# EAGLE board TWV (EAGLE 9.6.2)
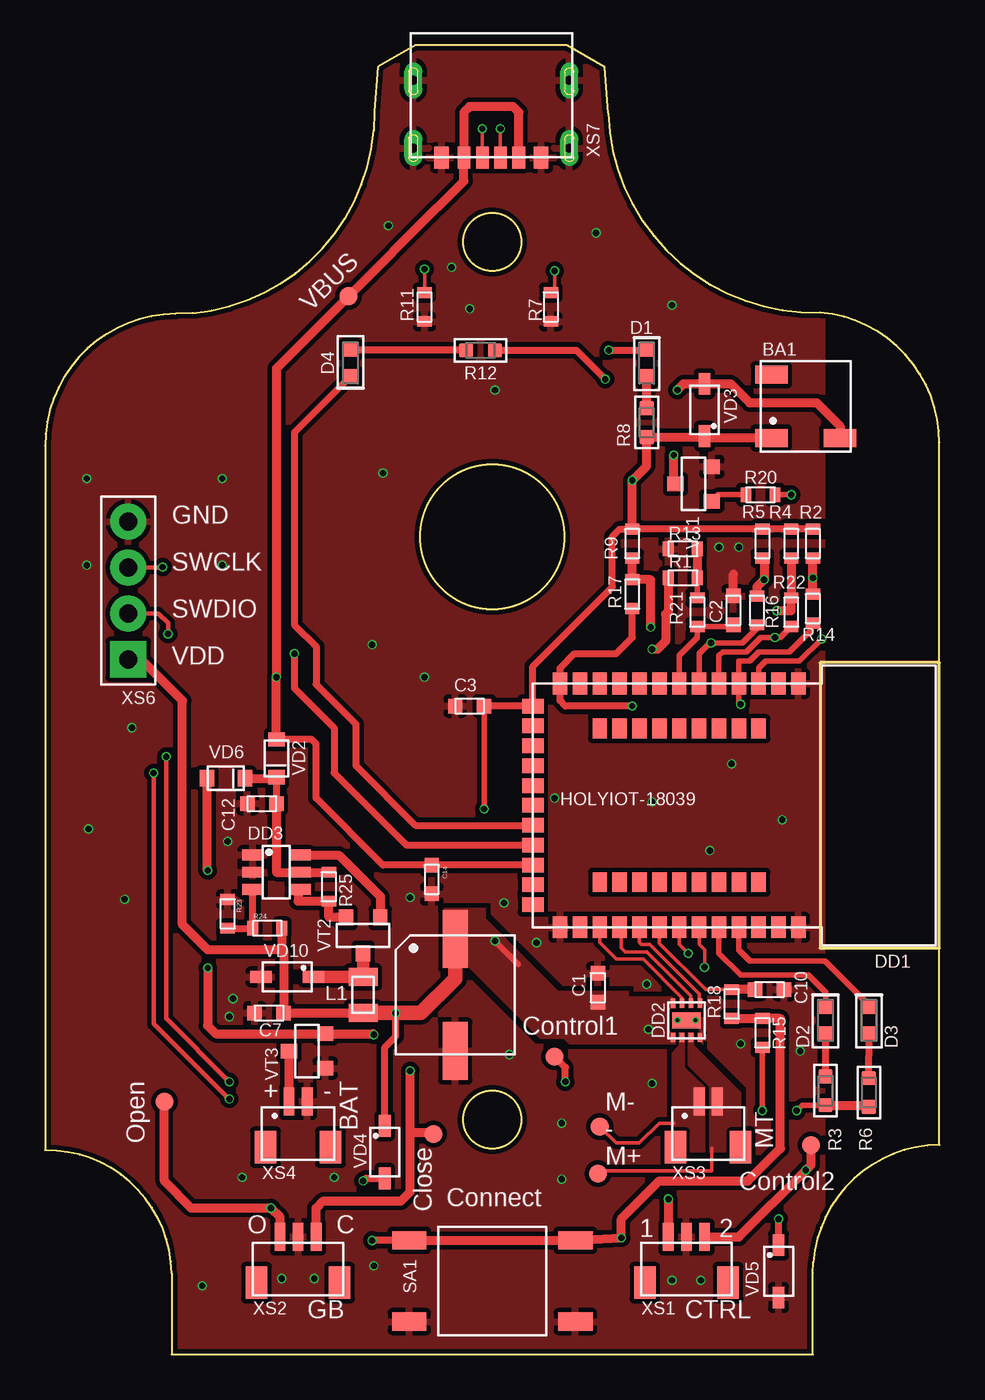
[diagram p0: board, top side]
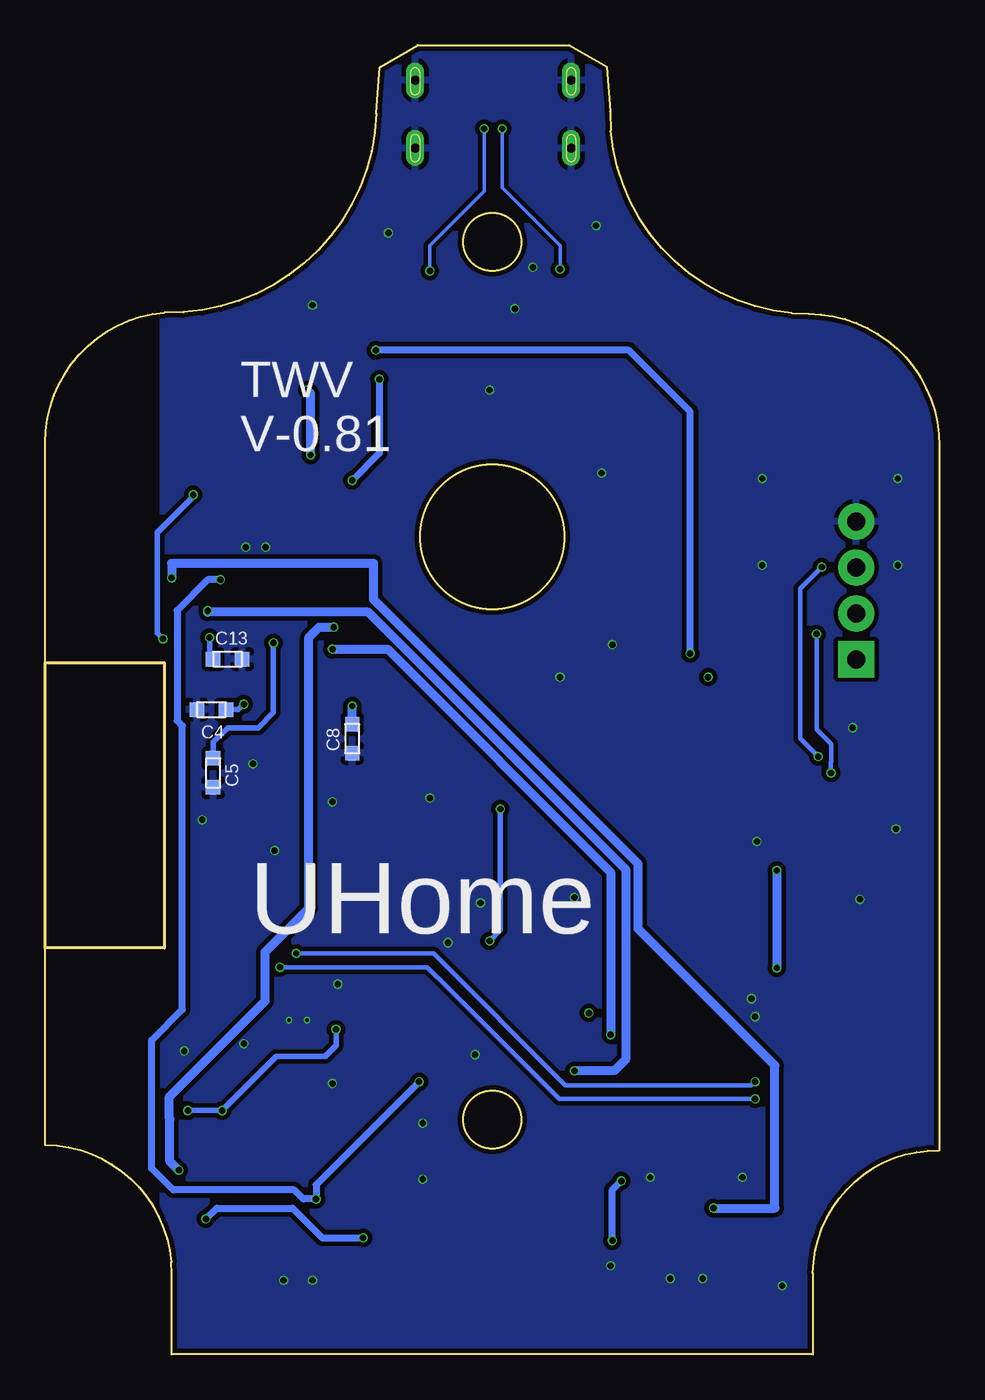
[diagram p1: board, bottom side, seen from below]

Size 49.5 x 72.5 mm. Coordinates in mm from the lower left corner, seen from the top.
Outline: 8.18,57.67 arc80 18.18,67.77 18.23,68.83 18.41,71.3 20.5,72.5 28.88,72.5 30.97,71.29 31.18,68.72 arc90 42.91,57.7 arc-80 49.47,51.13 49.5,50.5 49.5,11.6 arc85 42.53,5.11 42.5,4.5 42.5,0 7,0 7,4.5 arc90 0,11.3 0,50.3 arc-90 7.22,57.62 8.18,57.67
Outline: circle at 24.75,12.99 radius 1.6
Outline: circle at 24.75,61.6 radius 1.6
Outline: circle at 24.75,45.27 radius 4
Copper layers (1*16): Top 0.035mm / dielectric 1.6mm / Bottom 0.035mm
Design rules "jlcpcb-2layers": minimum track width 5mil, minimum drill 0.3mm, track to track 5mil, track to pad 5mil, pad to pad 5mil, via to via 5mil, smd to smd 5mil, copper to edge 0.2mm, drill to drill 6mil, minimum pad ring 10mil, minimum via ring 3mil, stop-mask expansion 4mil, vias tented up to drill 0mil, thermal gap 10mil
Net classes: 0 default: width 0.2 mm, drill 0.3 mm, clearance 0.2 mm
Milling: 4 lines

## Footprints (pad centres in the part's own frame; a part is rotated, then mirrored left to right if it is on the bottom)
SMD-5025-0340-12Ω = smd 1.8 x 1: + -1.9,-1.75; - 1.9,-1.75; GND -1.9,1.75
0603 = smd 0.8 x 0.8: 1 -0.8,0; 2 0.8,0
6.3X8 = smd 1.4 x 3.2: + 0,3.1; - 0,-3.1
0603' = smd 0.8 x 0.8: A 0.75,0; C -0.75,0
HOLYIOT-18039 = smd 1.2 x 0.8: 1 -6.75,6.6; 2 -6.75,5.5; 3 -6.75,4.4; 4 -6.75,3.3; 5 -6.75,2.2; 6 -6.75,1.1; 7 -6.75,0; 8 -6.75,-1.1; 9 -6.75,-2.2; 10 -6.75,-3.3; 11 -6.75,-4.4; 12 -6.75,-5.5; 13 -6.75,-6.6; 25 6.75,-6.6; 26 6.75,-5.5; 27 6.75,-4.4; 28 6.75,-3.3; 29 6.75,-2.2; 30 6.75,-1.1; 31 6.75,0; 32 6.75,1.1; 33 6.75,2.2; 34 6.75,3.3; 35 6.75,4.4; 36 6.75,5.5; 37 6.75,6.6 | smd 0.8 x 1.2: 14 -5.5,-8.1; 15 -4.4,-8.1; 16 -3.3,-8.1; 17 -2.2,-8.1; 18 -1.1,-8.1; 19 0,-8.1; 20 1.1,-8.1; 21 2.2,-8.1; 22 3.3,-8.1; 23 4.4,-8.1; 24 5.5,-8.1 | smd 1.1 x 0.8: 38 -4.25,4.4; 39 -4.25,3.3; 40 -4.25,2.2; 41 -4.25,1.1; 42 -4.25,0; 43 -4.25,-1.1; 44 -4.25,-2.2; 45 -4.25,-3.3; 46 -4.25,-4.4; 47 4.25,4.4; 48 4.25,3.3; 49 4.25,2.2; 50 4.25,1.1; 51 4.25,0; 52 4.25,-1.1; 53 4.25,-2.2; 54 4.25,-3.3; 55 4.25,-4.4
WSON-8 = smd 0.5 x 0.25: 1 -0.95,0.75; 2 -0.95,0.25; 3 -0.95,-0.25; 4 -0.95,-0.75; 5 0.95,-0.75; 6 0.95,-0.25; 7 0.95,0.25; 8 0.95,0.75 | smd 0.9 x 1.6: GND 0,0
SOT23-6 = smd 0.6 x 1.2: 1 -0.95,-1.3; 2 0,-1.3; 3 0.95,-1.3; 4 0.95,1.3; 5 0,1.3; 6 -0.95,1.3
0805 = smd 1 x 1.6: P$1 -1,0; P$2 1,0
0603'' = smd 0.6 x 0.8: 1 -0.8,0; 2 0.8,0
RES0603 = smd 0.8 x 0.8: 1 -0.8,0; 2 0.8,0
K2-1102SP-Z4SC-04 = smd 1.9 x 1: 1 -4.6,2.25; 2 -4.6,-2.25; 3 4.6,-2.25; 4 4.6,2.25
TEST_POINT_2MM = smd 1 x 1: 1 0,0
0805' = smd 0.8 x 0.9: 1 -1.05,0; 2 1.05,0
SOD-123F = smd 1.2 x 0.65: A -1.45,0; C 1.45,0
SOT-23 = smd 0.8 x 0.9: 1 -0.95,-1; 2 0.95,-1; 3 0,1
BM03B-SRSS-TB = smd 0.6 x 1.55: 1 -1,0; 2 0,0; 3 1,0 | smd 1.2 x 1.8: SHIELD@1 -2.3,-2.525; SHIELD@2 2.3,-2.525
BM02B-SRSS-TB = smd 0.6 x 1.55: 1 -0.5,0; 2 0.5,0 | smd 1.2 x 1.8: SHIELD@1 -1.8,-2.525; SHIELD@2 1.8,-2.525
TH1X4-2.54MM = drill 1 pad 2 square: 1 0,3.81 | drill 1 pad 2: 2 0,1.27; 3 0,-1.27; 4 0,-3.81
918-418K2023S40026 = smd 0.7 x 1.2: A5 0.5,-0.53; A9 -1.52,-0.53; B5 -0.5,-0.53; B9 1.52,-0.53 | smd 0.8 x 1.2: A12 -2.75,-0.53; B12 2.75,-0.53 | drill 0.5 long: SH1 -4.32,0; SH2 4.32,0; SH3 -4.32,3.75; SH4 4.32,3.75

## Placement (x,y rotation side)
BA1  SMD-5025-0340-12Ω  [SMD-5025-0340-12Ω]  42.1,52.5 0 top
C1  0.1 uF  [0603]  30.6,20.3 90 top
C2  1 uF  [0603]  38.1,41.2 90 top
C3  0.1 uF  [0603]  23.5,35.9 180 top
C4  1uF  [0603]  40.3,35.7 180 bottom
C5  1uF  [0603]  40.2,32.2 270 bottom
C6  220 uF  [6.3X8]  22.7,19.9 0 top
C7  0.47 uF  [0603]  12.4,18.9 180 top
C8  1uF  [0603]  32.5,34.1 270 bottom
C10  1uF  [0603]  40.1,20.2 0 top
C12  10uF  [0603]  12,30.5 180 top
C13  1uF  [0603]  39.4,38.5 0 bottom
C14  0.1 uF  [0603]  21.4,26.3 270 top
D1  BL-HKC37A-AV-TRB  [0603']  33.3,54.9 270 top
D2  150060RS75000  [0603']  43.2,18.5 270 top
D3  150060RS75000  [0603']  45.6,18.5 270 top
D4  BL-HB337A-AV-TRB  [0603']  16.9,54.9 90 top
DD1  HOLYIOT-18039  [HOLYIOT-18039]  35.1,30.4 270 top
DD2  DRV8837CDSGR  [WSON-8]  35.5,18.5 90 top
DD3  TPS64201DBVR  [SOT23-6]  12.8,26.7 270 top
L1  MCQ1V2012-4R7-R  [0805]  17.6,19.9 270 top
R1  470 kOhm  [0603'']  35.3,43 180 top
R2  470 kOhm  [0603'']  42.5,44.9 90 top
R3  330  [RES0603]  43.2,14.6 90 top
R4  470 kOhm  [0603'']  41.3,44.9 90 top
R5  470 kOhm  [0603'']  39.7,44.9 90 top
R6  330  [RES0603]  45.6,14.5 90 top
R7  5.1 kOhm  [0603'']  28,58 90 top
R8  330  [RES0603]  33.3,51.6 90 top
R9  470 kOhm  [0603'']  32.5,44.9 90 top
R11  5.1 kOhm  [0603'']  21,58 90 top
R12  330  [RES0603]  24.1,55.6 180 top
R13  470 kOhm  [0603'']  35.3,44.6 0 top
R14  1kOhm  [0603'']  42.5,41.3 270 top
R15  470 kOhm  [0603'']  39.7,17.8 270 top
R16  1kOhm  [0603'']  39.4,41.2 270 top
R17  1kOhm  [0603'']  32.5,42.1 270 top
R18  1kOhm  [0603'']  38,19.4 90 top
R20  82  [0603'']  39.6,47.6 180 top
R21  1 kOhm  [0603'']  36.1,41.1 270 top
R22  1kOhm  [0603'']  41.3,41.1 270 top
R23  360 kOhm  [0603'']  10.1,24.4 270 top
R24  620 kOhm  [0603'']  12.3,23.6 0 top
R25  33 mOhm  [0603'']  15.7,25.9 270 top
SA1  K2-1102SP-Z4SC-04  [K2-1102SP-Z4SC-04]  24.75,4.07 180 top
T3  TEST_POINT_2MM  [TEST_POINT_2MM]  28.2,16.5 0 top
T4  TEST_POINT_2MM  [TEST_POINT_2MM]  6.6,14 0 top
T5  TEST_POINT_2MM  [TEST_POINT_2MM]  21.5,12.2 0 top
T6  TEST_POINT_2MM  [TEST_POINT_2MM]  42.4,11.6 0 top
T9  TEST_POINT_2MM  [TEST_POINT_2MM]  30.6,10 0 top
T10  TEST_POINT_2MM  [TEST_POINT_2MM]  30.7,12.6 0 top
T11  TEST_POINT_2MM  [TEST_POINT_2MM]  16.8,58.6 0 top
VD2  SD0805S040S0R5  [0805']  12.8,33 270 top
VD3  SD103CW-AQ  [SOD-123F]  36.5,52.3 270 top
VD4  SD103CW-AQ  [SOD-123F]  18.8,11.2 90 top
VD5  SD103CW-AQ  [SOD-123F]  40.6,4.6 90 top
VD6  SD0805S040S0R5  [0805']  10,31.9 0 top
VD10  SD103CW-AQ  [SOD-123F]  13.4,20.9 0 top
VT1  2SC1623  [SOT-23]  35.9,48.2 90 top
VT2  SI2333  [SOT-23]  17.6,23.2 180 top
VT3  IRLML6401  [SOT-23]  14.5,16.8 90 top
XS1  BM03B-SRSS-TB  [BM03B-SRSS-TB]  35.5,6.5 0 top
XS2  BM03B-SRSS-TB  [BM03B-SRSS-TB]  14,6.5 0 top
XS3  BM02B-SRSS-TB  [BM02B-SRSS-TB]  36.7,14 0 top
XS4  BM02B-SRSS-TB  [BM02B-SRSS-TB]  14,14 0 top
XS6  TH1X4-2.54MM  [TH1X4-2.54MM]  4.6,42.3 180 top
XS7  918-418K2023S40026  [918-418K2023S40026]  24.7,66.8 0 top

## Library data of the parts
BA1 = Buzzers
C1-C8 C10 C12-C14 = Capacitor
D1-D4 = VDD-LED; CATEGORY: LED; DESCRIPTION: LED RED CLEAR 0603 SMD; MANUFACTURER: Würth Elektronik; MOUNTING_TYPE: SMD; MPN: 150060RS75000; PACKAGE: 0603; URL: https://www.we-online.de/katalog/datasheet/150060RS75000.pdf
DD1 = Modules
DD2 = Driver
DD3 = Power-IC
L1 = Inductors
R1 R2 R4 R5 R7 R9 R11 R13-R18 R20-R25 = Resistors
R3 R6 R8 R12 = VDD-Resistors; CATEGORY: Chip Resistor; DESCRIPTION: RES SMD 39 OHM 5% 1/10W 0603; MANUFACTURER: Yageo; MOUNTING_TYPE: SMD; MPN: RC0603JR-0739RL; PACKAGE: 0603; URL: https://www.digikey.com/product-detail/en/yageo/RC0603JR-0739RL/311-39GRCT-ND/729726
SA1 = Buttons
T3-T6 T9-T11 = VDD-Connectors
VD2-VD6 VD10 = Diode
VT1-VT3 = Transistor
XS1-XS4 = Connectors
XS6 = TestPoint
XS7 = USB; JLCPCB: C2763104

## Nets
+3.3V: BA1.+ C1.1 C3.1 C6.+ C7.1 DD1.14 DD2.1 DD2.8 L1.P$2 R2.2 R3.1 R4.2 R5.2 R6.1 R8.1 R9.2 R12.1 R15.2 R24.2 VD3.C VD4.C XS6.1
BATTERY: C2.1 DD1.7 R21.2
BUTTON: C10.1 DD1.30 R18.2
BUZ: DD1.3 R20.1
CLOSE: C13.1 DD1.5 R22.2
CONTROL: C5.1 DD1.6 R16.2
CONTROL2: C8.1 DD1.13 R17.2
D1: D1.C DD1.21
D4: D4.C DD1.20
GND: C1.2 C2.2 C3.2 C4.2 C5.2 C6.- C7.2 C8.2 C10.2 C12.2 C13.2 C14.2 DD1.1 DD1.25 DD1.37 DD2.4 DD2.GND DD3.1 DD3.2 R7.1 R11.1 R13.1 R23.1 SA1.1 SA1.4 VD5.A VD10.A VT1.2 VT3.1 XS1.2 XS2.2 XS4.2 XS6.4 XS7.A12 XS7.B12 XS7.SH1 XS7.SH2 XS7.SH3 XS7.SH4
IN1: DD1.28 DD2.6
IN2: DD1.29 DD2.5
LED1: D2.C DD1.33
LED2: D3.C DD1.34
M+: DD2.3 T9.1 XS3.2
M-: DD2.2 T10.1 XS3.1
N$1: R15.1 R18.1 SA1.2 SA1.3 VD4.A VD5.C
N$2: VT3.3 XS4.1
N$3: R11.2 XS7.B5
N$5: BA1.- VD3.A VT1.3
N$6: D1.A R8.2
N$7: R7.2 XS7.A5
N$9: D2.A R3.2
N$10: D3.A R6.2
N$11: R20.2 VT1.1
N$13: D4.A R12.2
N$18: R1.1 R13.2 R21.1
N$22: L1.P$1 VD10.C VT2.3
N$23: DD3.6 VT2.1
N$25: DD3.4 R25.2 VT2.2
N$26: DD3.3 R23.2 R24.1
NSLEEP: DD1.27 DD2.7
OPEN: C4.1 DD1.4 R14.2
SWDCLK: DD1.31 XS6.3
SWDIO: DD1.32 XS6.2
VBAT: R1.2 VD6.1 VT3.2
VBUS: C14.1 DD1.22 T11.1 VD2.1 XS7.A9 XS7.B9
VOUT: C12.1 DD3.5 R25.1 VD2.2 VD6.2
XS1.1: R2.1 R14.1 T4.1 XS2.1
XS1.3: R4.1 R22.1 T5.1 XS2.3
XS2.1: R5.1 R16.1 T3.1 XS1.1
XS2.3: R9.1 R17.1 T6.1 XS1.3

## Tracks (layer width: path | path; a pad name or v marks a point on that pad's centre or on a via)
+3.3V  (via drill 0.35)
  Top 0.3: R3.1 41.9,13.8 v41.6,13.5 | C3.1 v24.3,30.2 | R15.2 v39.7,13.5 | v24.9,22.9 26.2,21.6
  Top 0.4: R2.2 R4.2 R5.2 R9.2 31.8,45.7 31.4,45.3 31.4,42.5 27,38.1 DD1.14 C3.1 | R12.1 29.4,55.6 v31,54 | VD4.C 18.8,17 19.4,17.6 v19.4,18.9
  Top 0.5: R3.1 45.6,13.8 R6.1 | R24.2 13.1,22.4 | 13.1,22.4 13.2,22.4 C7.1 L1.P$2 | 13.1,22.4 9,22.4 7.6,23.8 7.6,36.2 5.31,38.49 XS6.1 | R9.2 v32.5,48.4 33.3,49.2 R8.1 36.45,50.8 VD3.C 36.6,50.75 BA1.+
  Top 0.8: L1.P$2 v19.4,18.9 20.8,18.9 22.7,20.8 C6.+
  Bottom 0.3: v41.6,13.5 v39.7,13.5 36.7,16.5 34,16.5 33.4,17.1 v33.4,18 | v24.3,30.2 24.3,23.5 v24.9,22.9
  Bottom 0.4: v31,54 31,49.9 v32.5,48.4
  pour Top (no thermals): 34.9,17.2 34.9,19.8 32.3,19.8 32.3,20.1 28.4,20.1 24.4,24.1 24.4,24.7 22.1,24.7 22.1,22.8 27.4,17.5 28.7,17.5 29,17.2
BATTERY
  Top 0.3: DD1.7 35.1,38.7 36.1,39.7 R21.2 38,40.3 C2.1
BUTTON
  Top 0.2: DD1.30 34,22.77 36.57,20.2 R18.2
  Top 0.5: C10.1 R18.2
BUZ  (via drill 0.35)
  Top 0.3: DD1.3 39.5,38 39.9,38.4 41.76,38.4 v42.98,39.62 | v41.3,47.6 R20.1
  Bottom 0.3: v42.98,39.62 43.3,39.94 43.3,45.5 41.3,47.5 v41.3,47.6
CLOSE  (via drill 0.35)
  Top 0.3: R22.2 40.7,39.7 v40.4,39.7 39.61,39.7 38.81,38.9 37.5,38.9 37.3,38.7 DD1.5
  Bottom 0.3: C13.1 40.4,38.7 v40.4,39.7
CONTROL  (via drill 0.35)
  Top 0.3: R16.2 39.4,40.2 38.6,39.4 v36.86,39.4 36.8,39.4 36.2,38.8 DD1.6
  Bottom 0.3: C5.1 40.2,33.9 39.4,34.7 37.7,34.7 36.86,35.54 v36.86,39.4
CONTROL2  (via drill 0.35)
  Top 0.4: v32.5,35.9 28.8,35.9 28.5,36.2 DD1.13 28.5,38 29.3,38.8 31.6,38.8 32.5,39.7 R17.2
  Bottom 0.5: C8.1 v32.5,35.9
D1  (via drill 0.35)
  Top 0.4: v31.2,55.6 33.25,55.6 D1.C | v13.8,38.8 13.8,36.9 16,34.7 16,32.2 20,28.2 DD1.21
  Bottom 0.4: v13.8,38.8 13.8,52.2 17.2,55.6 v31.2,55.6
D4
  Top 0.4: D4.C 13.8,51.05 13.8,40.4 15,39.2 15,37.1 17.2,34.9 17.2,32.6 20.5,29.3 DD1.20
GND  (via drill 0.2, 0.35)
  Top 0.5: C2.2 38.1,43.2
  other vias: 38.5,17.2 2.3,48.5 28.2,30.8 20.2,25.3 30.5,62.1 18.1,39.3 2.4,29.1 21,37.5 19,62.5 22.5,60.2 33.6,15 10.1,28.4 10.2,18.7 10.4,19.7 25.4,25 35,18.5 36,18.5 34.7,58.1 8.7,3.8 18.2,4.9 9.8,43.7 2.3,43.7 9.8,48.5 33.6,30.6 25.7,16.6 18.7,48.8 24.9,53.4 23.5,57.9 38,32.7 36.8,27.9 40.8,29.6 33.3,20.5 41.8,16.8 38.4,44.7 37.3,44.7 4.8,34.7 4.4,25.2 10.9,9.8 16,9.8 28.6,9.7 28.6,12.8 27.2,22.8 34.7,4.1 36.3,4.1 13.1,4.2 14.9,4.2
  pour Bottom (isolate 0.25, rank 2): 0,0 0,73.5 43,73.5 43,0
  pour Top (isolate 0.25, rank 2): 0,0 0,73.5 43,73.5 43,0
IN1
  Top 0.2: DD1.28 31.9,23.55 31.9,22.5 32.1,22.3 33.3,22.3 35.75,19.85 DD2.6
IN2
  Top 0.2: DD1.29 32.9,22.8 33,22.7 33.47,22.7 36.22,19.95 36.22,19.48 DD2.5
LED1
  Top 0.3: D2.C 43.2,20.05 42.25,21 38.5,21 37.3,22.2 DD1.33
LED2
  Top 0.3: D3.C 45.6,19.35 43.15,21.8 39,21.8 38.4,22.4 DD1.34
M+
  Top 0.2: T9.1 30.75,10.15 36.9,10.15 36.9,11.4
  pour Top (no thermals): 35.6,17.9 35.9,17.9 35.9,17.1 38.5,14.5 38.5,11.2 36.8,11.2 36.8,14.8 35.6,16
M-
  Top 0.2: T10.1 31.6,11.7 32.9,11.7 34,12.8 34.8,12.8
  pour Top (no thermals): 35.11,17.9 35.39,17.9 35.39,15.9 36.5,14.8 36.5,11.2 34.7,11.2 34.7,16.7 35.11,17.1
N$1  (via drill 0.35)
  Top 0.4: VD5.C v40.6,7.5 | SA1.3 18.12,6.32 v18.1,6.3 | v17.6,9.6 17.75,9.75 VD4.A
  Top 0.5: R18.1 R15.1 40.7,18.6 40.7,11.4 38.9,9.6 34,9.6 31.9,7.5 v31.9,6.45 SA1.2 SA1.3
  Bottom 0.4: v40.6,7.5 40,8.1 35.8,8.1 34.15,6.45 v31.9,6.45 | v18.1,6.3 18.1,9.1 v17.6,9.6
N$2
  Top 0.5: XS4.1 VT3.3
N$3  (via drill 0.35)
  Top 0.2: v21,60.1 R11.2 | v24.2,67.87 XS7.B5
  Bottom 0.2: v24.2,67.87 24.2,64.6 21,61.4 v21,60.1
N$5  (via drill 0.35)
  Top 0.5: VT1.3 34.8,48.3 v34.8,49.8 | v35,53.4 35.35,53.75 VD3.A 37.95,53.75 39,52.7 42.7,52.7 44,51.4 BA1.-
  Bottom 0.5: v34.8,49.8 34.8,53.2 v35,53.4
N$6
  Top 0.5: R8.2 D1.A
N$7  (via drill 0.35)
  Top 0.2: v28.2,60 28.2,59 R7.2 | v25.2,67.87 XS7.A5
  Bottom 0.2: v28.2,60 28.2,61.4 25.2,64.4 v25.2,67.87
N$9
  Top 0.4: R3.2 43.21,17.71 D2.A
N$10
  Top 0.4: R6.2 45.61,17.72 D3.A
N$11
  Top 0.3: VT1.1 37.25,47.6 R20.2
N$13
  Top 0.4: R12.2 16.95,55.6 D4.A
N$18
  Top 0.3: R21.1 R1.1
  Top 0.5: R13.2 R1.1
N$22
  Top 0.7: VT2.3 L1.P$1 VD10.C
N$23
  Top 0.5: DD3.6 16.25,27.65 18.55,25.35 VT2.1
N$25
  Top 0.5: VT2.2 15.7,24.2 R25.2 14,25.1 14,25.65 DD3.4
N$26
  Top 0.4: R23.2 R24.1 DD3.3
NSLEEP
  Top 0.2: DD2.7 35.25,19.75 33.1,21.9 31.6,21.9 30.7,22.8 DD1.27
OPEN  (via drill 0.35)
  Top 0.3: R14.2 42.4,40.4 42.4,40.1 41.2,38.9 39.51,38.9 39.01,38.4 38.4,38.4 DD1.4 38.4,36.1 v38.5,36
  Bottom 0.3: C4.1 38.8,35.7 v38.5,36
SWDCLK  (via drill 0.35)
  Top 0.2: DD1.31 35.1,22.7 v35.6,22.2
  Top 0.25: v6.7,33.1 6.7,18.6 v10.2,15.1 | v6.5,43.6 6.47,43.57 XS6.3
  Bottom 0.25: v10.2,15.1 10.4,14.9 20.7,14.9 28,22.2 v35.6,22.2 | v6.5,43.6 7.7,42.4 7.7,34.1 v6.7,33.1
SWDIO  (via drill 0.35)
  Top 0.2: DD1.32 36.2,22.7 36.5,22.4 v36.5,21.44
  Top 0.25: v10.2,14.14 10.16,14.14 6,18.3 v6,32.2 | v6.8,39.9 6.8,40.5 6.27,41.03 XS6.2
  Bottom 0.25: v36.5,21.44 28.34,21.44 27.2,20.3 21.04,14.14 v10.2,14.14 | v6,32.2 6,32.81 6,33.8 6.8,34.6 v6.8,39.9
VBAT  (via drill 0.35)
  Top 0.5: VD6.1 8.95,26.85 v9,26.8 | v9,21.4 9,18.2 9.45,17.75 VT3.2 18.15,17.75 v18.2,17.7 | R1.2 34.5,41.14 34.35,40.99 34.35,39.5 33.9,39.05 v33.6,39.05
  Bottom 0.5: v33.6,39.05 30.55,39.05 18.2,26.7 v18.2,17.7 | v9,26.8 v9,21.4
VBUS  (via drill 0.35)
  Top 0.4: T11.1 | DD1.22 C14.1 18.7,27.1 15,30.8 15,33.8 14.75,34.05 VD2.1
  Top 0.5: VD2.1 v12.8,37.5 12.8,54.6 T11.1 | T11.1 21.69,63.5 21.7,63.5 23.18,64.98 XS7.A9 23.18,68.78 23.5,69.1 25.9,69.1 26.22,68.78 XS7.B9
VOUT
  Top 0.4: VD2.2 C12.1
  Top 0.5: VD6.2 12.75,31.9 VD2.2 | C12.1 12.8,26.7 DD3.5 R25.1
XS1.1  (via drill 0.35)
  Top 0.5: R14.1 v42.5,43 R2.1 | XS2.1 13,7.6 v12.5,8.1 8.1,8.1 6.6,9.6 T4.1
  Bottom 0.5: v42.5,43 42.5,43.8 31.32,43.8 31.32,41.8 16.67,27.15 16.67,23.57 9.1,16 9.1,8.1 v12.5,8.1
XS1.3  (via drill 0.35)
  Top 0.5: v40.5,41.18 41.28,41.18 41.3,41.2 R22.1 R4.1 | XS2.3 15,8.1 15.4,8.5 19.7,8.5 20.2,9 20.2,12.3 | 20.2,12.3 v20.2,15.7 | 20.2,12.3 21.4,12.3 T5.1
  Bottom 0.5: v40.5,41.18 40.5,41.1 31.61,41.1 17.37,26.86 17.37,16.33 18,15.7 v20.2,15.7
XS2.1  (via drill 0.35)
  Top 0.4: v28.8,15.1 28.8,15.9 T3.1
  Top 0.5: R16.1 39.4,42.5 v39.8,42.9 39.8,44 R5.1 | v34.5,8.6 XS1.1
  Bottom 0.4: v28.8,15.1 34.5,9.4 v34.5,8.6 35.2,8.6 35.7,9.1 42.4,9.1 43.6,10.3 43.6,17.4 41.9,19.1 41.9,34.8 42.2,35.1 42.2,41.2 40.5,42.9 v39.8,42.9
XS2.3  (via drill 0.35)
  Top 0.5: R9.1 R17.1 33.5,42.9 33.5,40.29 v33.52,40.27 | XS1.3 38.4,6.5 v42.1,10.2 42.4,10.5 T6.1
  Bottom 0.5: v42.1,10.2 42.6,10.7 42.6,13.03 42.63,13.06 42.63,14.27 37.33,19.57 37.33,22.28 34.9,24.71 34.9,39.7 34.33,40.27 v33.52,40.27

## Text on the board
tPlace: VBUS | GND | SWCLK | SWDIO | VDD | Control1 | M- | Open | M+ | Close
tNames: + | - | BAT | - | MT | Control2 | Connect | O | C | 1 | 2 | GB | CTRL
bNames: TWV / V-0.81 | UHome